# Altium PCB uTCA_MCH_PCB3.pcbdoc (part 8 of 8)
Units mm, origin at the board's own origin, x right, y up, seen from the top; angles counter-clockwise.
Board outline 182.75 x 75.8 mm, 10 copper layers (Top Layer, GND1, MidLayer1, PWR1, Mid-Layer 2, GND2, PWR2, Mid-Layer 3, GND3, Bottom Layer), stack 1.568 mm thick; 778 components, 977 nets, 4756 pads, 1214 vias.
Unrouted connection lines stored in the file: 1790.
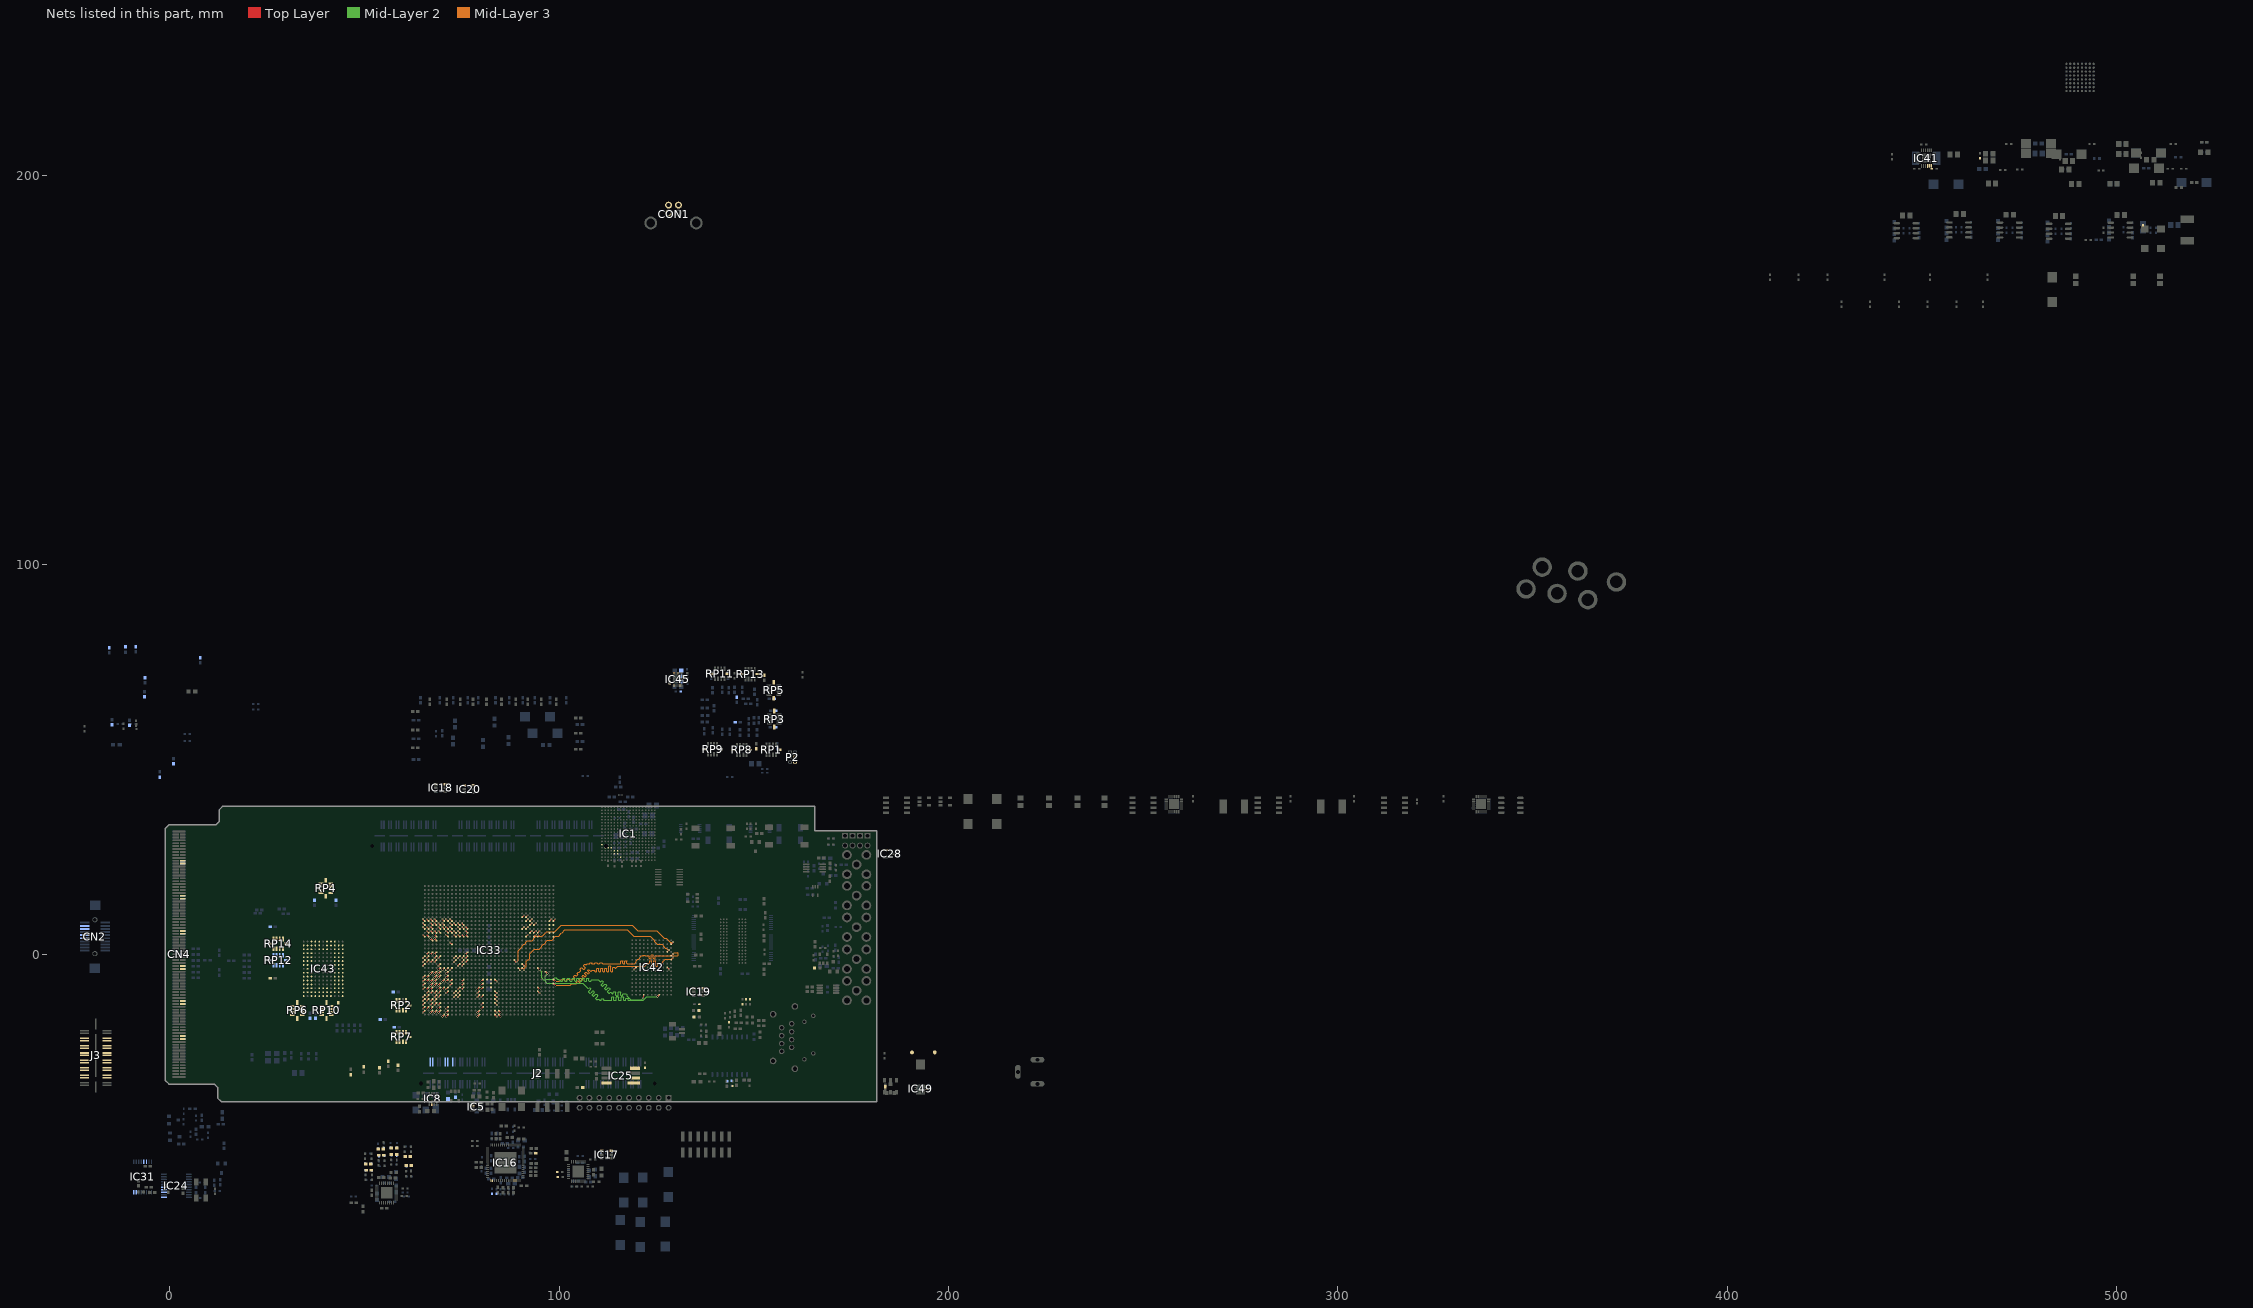
[diagram p16: the nets of this part, all layers, seen from the top]

## Via types
v1: diameter 0.5, hole 0.2, Top Layer to Bottom Layer, 1149 vias
v2: diameter 0.508, hole 0.254, Top Layer to Bottom Layer, 32 vias
v3: diameter 0.66, hole 0.33, Top Layer to Bottom Layer, tented top, 29 vias
v4: diameter 0.5, hole 0.2, Top Layer to Bottom Layer, tented top, 4 vias

## Nets (pads, with @x,y where several pads share a name; then routed paths per layer and width w, separated by ;. In a path a pad name is that pad's centre, name@x,y a point inside that pad or via, vN(x,y) a via of type N, cw(c..) or ccw(c..) an arc to the next point about the centre after c; other vN are vias at no path point) (continued)
Q1_Q32: IC33.A26 IC42.K1 | length 53.9
  Top Layer w0.175: IC33.A26@98.5,-7.5 v1(99,-8) ; IC42.K1@128.75,-1.4 v1(129.25,-0.9)
  Mid-Layer 3 w0.109: v1(99,-8) 102.8,-8 103.2,-7.6 104.4,-7.6 104.509,-7.491 104.509,-7.345 104.372,-7.208 104.372,-7.062 104.591,-6.843 104.737,-6.843 105.157,-7.263 105.302,-7.263 105.521,-7.045 105.521,-6.899 105.134,-6.512 105.134,-6.366 105.353,-6.147 105.498,-6.147 105.885,-6.534 106.031,-6.534 106.25,-6.316 106.25,-6.17 105.874,-5.794 105.874,-5.648 106.093,-5.43 106.238,-5.43 106.614,-5.806 106.76,-5.806 106.979,-5.587 106.979,-5.441 106.592,-5.054 106.592,-4.908 106.81,-4.69 106.956,-4.69 107.343,-5.077 107.489,-5.077 107.708,-4.858 107.708,-4.712 107.288,-4.292 107.288,-4.147 107.506,-3.928 107.652,-3.928 108.072,-4.348 108.218,-4.348 108.466,-4.1 109,-4.1 109.123,-4.223 109.123,-4.347 109.226,-4.45 109.535,-4.45 109.638,-4.347 109.638,-3.753 109.742,-3.65 110.051,-3.65 110.154,-3.753 110.154,-4.347 110.257,-4.45 110.566,-4.45 110.669,-4.347 110.669,-3.753 110.772,-3.65 111.082,-3.65 111.185,-3.753 111.185,-4.347 111.288,-4.45 111.597,-4.45 111.7,-4.347 111.7,-3.753 111.803,-3.65 112.112,-3.65 112.215,-3.753 112.215,-4.347 112.319,-4.45 112.628,-4.45 112.731,-4.347 112.731,-3.087 112.834,-2.984 113.143,-2.984 113.246,-3.087 113.246,-4.347 113.349,-4.45 113.659,-4.45 113.762,-4.347 113.762,-3.44 113.865,-3.337 114.174,-3.337 114.277,-3.44 114.277,-3.477 114.35,-3.55 114.6,-3.55 115.05,-3.1 122,-3.1 122.771,-2.329 123.155,-2.329 123.258,-2.226 123.258,-1.737 123.361,-1.634 123.67,-1.634 123.773,-1.737 123.773,-3.026 123.876,-3.129 124.185,-3.129 124.288,-3.026 124.288,-1.737 124.392,-1.634 124.701,-1.634 124.804,-1.737 124.804,-3.026 124.907,-3.129 125.216,-3.129 125.319,-3.026 125.319,-2.433 125.422,-2.329 126.378,-2.329 126.629,-2.078 126.629,-1.913 127.213,-1.329 128.821,-1.329 v1(129.25,-0.9)
Q1_Q33: IC33.A25 IC42.L1 | length 48
  Top Layer w0.175: IC33.A25@98.5,-6.5 v1(99,-7) ; IC42.L1@128.75,-0.4 v1(129.25,0.1)
  Mid-Layer 3 w0.109: v1(99,-7) 99.7,-7 100,-7 100.4,-6.6 100.631,-6.6 100.831,-6.4 101.2,-6.4 101.323,-6.523 101.323,-6.677 101.446,-6.8 101.815,-6.8 101.938,-6.677 101.938,-6.523 102.062,-6.4 102.431,-6.4 102.631,-6.6 103.15,-6.6 103.313,-6.437 103.596,-6.437 103.857,-6.176 103.857,-6.002 103.748,-5.893 103.748,-5.719 104.009,-5.458 104.183,-5.458 104.292,-5.567 104.466,-5.567 104.727,-5.305 104.727,-5.131 104.619,-5.023 104.619,-4.849 104.88,-4.587 105.163,-4.587 105.4,-4.35 105.531,-4.219 105.531,-4.045 105.422,-3.937 105.422,-3.763 105.683,-3.501 105.857,-3.501 106.249,-3.893 106.423,-3.893 106.684,-3.632 106.684,-3.458 106.292,-3.066 106.292,-2.892 106.553,-2.631 106.727,-2.631 106.836,-2.74 107.01,-2.74 107.25,-2.5 107.805,-2.5 107.908,-2.397 107.908,-2.303 108.011,-2.2 108.32,-2.2 108.423,-2.303 108.423,-2.397 108.526,-2.5 109.085,-2.5 109.208,-2.377 109.208,-2.307 109.331,-2.184 109.7,-2.184 109.823,-2.307 109.823,-2.377 109.946,-2.5 110.315,-2.5 110.438,-2.377 110.438,-2.307 110.562,-2.184 110.931,-2.184 111.054,-2.307 111.054,-2.377 111.177,-2.5 111.7,-2.5 111.8,-2.4 115.755,-2.4 115.858,-2.297 115.858,-1.803 115.961,-1.7 116.27,-1.7 116.373,-1.803 116.373,-2.297 116.476,-2.4 116.785,-2.4 116.888,-2.297 116.888,-1.803 116.992,-1.7 117.301,-1.7 117.404,-1.803 117.404,-2.297 117.507,-2.4 119.357,-2.4 119.8,-1.957 119.8,-1.7 120.171,-1.329 120.428,-1.329 120.679,-1.078 120.679,-0.863 121.093,-0.45 121.455,-0.45 121.558,-0.347 121.558,-0.329 121.661,-0.226 121.97,-0.226 122.073,-0.329 122.073,-0.347 122.176,-0.45 123.001,-0.45 123.104,-0.553 123.104,-1.047 123.207,-1.15 123.516,-1.15 123.619,-1.047 123.619,-0.237 123.722,-0.134 124.032,-0.134 124.135,-0.237 124.135,-1.047 124.238,-1.15 124.547,-1.15 124.65,-1.047 124.65,-0.553 124.753,-0.45 130.4,-0.45 130.55,-0.3 130.55,0.25 130.4,0.4 129.55,0.4 v1(129.25,0.1)
Q1_Q34: IC33.K22 IC42.M2 | length 48.3
  Top Layer w0.175: IC33.K22@89.5,-3.5 v1(90,-4) ; IC42.M2@127.75,0.6 v1(128.25,1.1)
  Mid-Layer 3 w0.109: v1(90,-4) 90.43,-3.571 91.037,-3.571 91.546,-3.062 91.546,-1.821 91.912,-1.454 92.188,-1.454 92.455,-1.188 92.455,0.105 93.666,1.316 94.923,1.316 95.571,1.963 95.571,2.178 95.963,2.571 96.178,2.571 96.571,2.963 96.571,3.178 96.963,3.571 98.178,3.571 98.571,3.963 98.571,4.178 99.043,4.65 99.9,4.65 100.457,5.207 100.457,5.349 100.68,5.572 100.822,5.572 101.5,6.25 117.5,6.25 119.15,4.6 123.4,4.6 124.5,3.5 124.5,3.243 125.213,2.53 126.428,2.53 126.87,2.087 126.87,1.872 127.192,1.55 127.5,1.55 127.95,1.1 v1(128.25,1.1)
Q1_Q35: IC33.L20 IC42.P1 | length 49.1
  Top Layer w0.175: IC33.L20@88.5,-1.5 v1(89,-2) ; IC42.P1@128.75,2.6 v1(129.25,3.1)
  Mid-Layer 3 w0.109: v1(89,-2) 89.5,-1.5 89.5,0.9 90.171,1.571 90.178,1.571 90.571,1.963 90.571,2.178 90.963,2.571 91.178,2.571 91.43,2.822 91.43,3.037 91.843,3.45 93.057,3.45 93.43,3.822 93.43,4.037 93.963,4.571 95.632,4.571 96.862,5.8 98.9,5.8 100.5,7.4 118.75,7.4 120.15,6 125.1,6 127.028,4.072 127.528,4.072 128.5,3.1 v1(129.25,3.1)
Q1_RPS: IC33.C23 IC42.A8 | length 47.8
  Top Layer w0.175: IC33.C23@96.5,-4.5 v1(97,-5) ; v1(121.6,-11.2) 121.75,-11.05 IC42.A8@121.75,-10.4
  Mid-Layer 2 w0.109: v1@97,-5.15 96.45,-5.7 96.45,-6.25 96.65,-6.45 98.635,-6.45 98.758,-6.327 98.758,-6.173 98.881,-6.05 99.25,-6.05 99.373,-6.173 99.373,-6.327 99.496,-6.45 99.8,-6.45 99.95,-6.6 100.135,-6.6 100.258,-6.723 100.258,-6.877 100.381,-7 100.75,-7 100.873,-6.877 100.873,-6.323 100.996,-6.2 101.365,-6.2 101.488,-6.323 101.488,-6.877 101.612,-7 101.981,-7 102.104,-6.877 102.104,-6.323 102.227,-6.2 102.596,-6.2 102.719,-6.323 102.719,-6.877 102.842,-7 103.212,-7 103.335,-6.877 103.335,-6.323 103.458,-6.2 103.827,-6.2 103.95,-6.323 103.95,-6.877 104.073,-7 104.442,-7 104.565,-6.877 104.565,-6.323 104.689,-6.2 105.058,-6.2 105.181,-6.323 105.181,-6.877 105.304,-7 105.673,-7 105.796,-6.877 105.796,-6.323 105.919,-6.2 106.289,-6.2 106.412,-6.323 106.412,-6.877 106.535,-7 106.904,-7 107.027,-6.877 107.027,-6.323 107.15,-6.2 107.519,-6.2 107.642,-6.323 107.642,-6.877 107.766,-7 108.135,-7 108.258,-6.877 108.258,-6.723 108.381,-6.6 110.1,-6.6 110.531,-7.031 110.705,-7.031 110.884,-6.851 111.058,-6.851 111.319,-7.112 111.319,-7.286 111.053,-7.553 110.786,-7.819 110.786,-7.993 111.047,-8.254 111.221,-8.254 111.488,-7.988 111.754,-7.721 111.928,-7.721 112.19,-7.982 112.19,-8.157 111.923,-8.423 111.657,-8.69 111.657,-8.864 111.918,-9.125 112.092,-9.125 112.358,-8.858 112.625,-8.592 112.799,-8.592 113.06,-8.853 113.06,-9.027 112.793,-9.293 112.527,-9.56 112.527,-9.734 112.788,-9.995 112.962,-9.995 113.141,-9.816 113.316,-9.816 113.62,-10.12 113.805,-10.12 113.928,-9.997 113.928,-9.744 114.051,-9.62 114.421,-9.62 114.544,-9.744 114.544,-10.497 114.667,-10.62 115.036,-10.62 115.159,-10.497 115.159,-9.744 115.282,-9.62 115.651,-9.62 115.774,-9.744 115.774,-10.497 115.897,-10.62 116.267,-10.62 116.39,-10.497 116.39,-10.244 116.513,-10.12 117.128,-10.12 117.45,-10.443 117.45,-10.743 118.357,-11.65 121.15,-11.65 v1(121.6,-11.2)
Q1_WPS: IC33.E22 IC42.A4 | length 48.2
  Top Layer w0.175: IC33.E22@94.5,-3.5 v1(95,-4) ; v1(125.25,-10.9) IC42.A4@125.75,-10.4
  Mid-Layer 2 w0.109: v1(95,-4) 95.5,-4.5 95.5,-6.107 95.963,-6.571 96.178,-6.571 96.571,-6.963 96.571,-7.178 96.843,-7.45 106.05,-7.45 107.356,-8.756 107.53,-8.756 107.709,-8.576 107.883,-8.576 108.144,-8.837 108.144,-9.011 107.878,-9.278 107.611,-9.544 107.611,-9.718 107.872,-9.979 108.046,-9.979 108.313,-9.713 108.579,-9.446 108.753,-9.446 109.015,-9.707 109.015,-9.882 108.748,-10.148 108.482,-10.415 108.482,-10.589 108.743,-10.85 108.917,-10.85 109.183,-10.583 109.45,-10.317 109.624,-10.317 109.885,-10.578 109.885,-10.752 109.618,-11.018 109.352,-11.285 109.352,-11.459 109.613,-11.72 109.787,-11.72 109.966,-11.541 110.141,-11.541 110.484,-11.884 110.669,-11.884 110.792,-11.761 110.792,-11.507 110.915,-11.384 111.284,-11.384 111.407,-11.507 111.407,-11.761 111.53,-11.884 113.335,-11.884 113.458,-11.761 113.458,-11.007 113.581,-10.884 113.95,-10.884 114.073,-11.007 114.073,-11.761 114.196,-11.884 114.565,-11.884 114.688,-11.761 114.688,-11.007 114.812,-10.884 115.181,-10.884 115.304,-11.007 115.304,-11.761 115.427,-11.884 115.796,-11.884 115.919,-11.761 115.919,-11.007 116.042,-10.884 116.412,-10.884 116.535,-11.007 116.535,-11.761 116.658,-11.884 117.027,-11.884 117.15,-11.761 117.15,-11.389 117.273,-11.266 117.642,-11.266 117.765,-11.389 117.765,-11.761 117.889,-11.884 121.566,-11.884 122.55,-10.9 v1(125.25,-10.9)
Q2_A0: IC33.AJ27 IC43.B4 RP6.5 | length 0.7
  Top Layer w0.175: v1(70,-9) IC33.AJ27@70.5,-8.5
Q2_A1: IC33.AM27 IC43.B8 RP6.10 | length 0.7
  Top Layer w0.175: v1(67,-9) IC33.AM27@67.5,-8.5
Q2_A2: IC33.AJ25 IC43.C5 RP6.7 | length 0.7
  Top Layer w0.175: v1(70,-7) IC33.AJ25@70.5,-6.5
Q2_A3: IC33.AH25 IC43.C6 RP6.8 | length 0.7
  Top Layer w0.175: v1(71,-7) IC33.AH25@71.5,-6.5
Q2_A4: IC33.AM28 IC43.C7 RP6.9 | length 0.7
  Top Layer w0.175: v1(67,-10) IC33.AM28@67.5,-9.5
Q2_A5: IC33.AN28 IC43.N5 RP2.9 | length 0.7
  Top Layer w0.175: v1(66,-10) IC33.AN28@66.5,-9.5
Q2_A6: IC33.AK28 IC43.N6 RP6.3 | length 0.7
  Top Layer w0.175: v1(69,-10) IC33.AK28@69.5,-9.5
Q2_A7: IC33.AL28 IC43.N7 RP6.4 | length 0.7
  Top Layer w0.175: v1(68,-10) IC33.AL28@68.5,-9.5
Q2_A8: IC33.AP29 IC43.P4 RP4.10 | length 0.7
  Top Layer w0.175: v1(65,-11) IC33.AP29@65.5,-10.5
Q2_A9: IC33.AN29 IC43.P5 RP4.9 | length 0.7
  Top Layer w0.175: v1(66,-11) IC33.AN29@66.5,-10.5
Q2_A10: IC33.AL29 IC43.P7 RP4.5 | length 0.7
  Top Layer w0.175: v1(68,-11) IC33.AL29@68.5,-10.5
Q2_A11: IC33.AP31 IC43.P8 RP4.3 | length 0.7
  Top Layer w0.175: v1(65,-13) IC33.AP31@65.5,-12.5
Q2_A12: IC33.AP30 IC43.R3 RP2.10 | length 0.7
  Top Layer w0.175: v1(65,-12) IC33.AP30@65.5,-11.5
Q2_A13: IC33.AG26 IC43.R4 RP2.7 | length 0.7
  Top Layer w0.175: v1(72,-8) IC33.AG26@72.5,-7.5
Q2_A14: IC33.AG25 IC43.R5 RP4.8 | length 0.7
  Top Layer w0.175: v1(72,-7) IC33.AG25@72.5,-6.5
Q2_A15: IC33.AM30 IC43.R7 RP4.7 | length 0.7
  Top Layer w0.175: v1(67,-12) IC33.AM30@67.5,-11.5
Q2_A16: IC33.AN30 IC43.R8 RP4.4 | length 0.7
  Top Layer w0.175: v1(66,-12) IC33.AN30@66.5,-11.5
Q2_A17: IC33.AH28 IC43.R9 RP4.2 | length 0.7
  Top Layer w0.175: v1(71,-10) IC33.AH28@71.5,-9.5
Q2_A18: IC33.AH27 IC43.A9 RP10.5 | length 0.7
  Top Layer w0.175: v1(71,-9) IC33.AH27@71.5,-8.5
Q2_BWS0: IC33.AC14 IC43.B7 | length 0.7
  Top Layer w0.175: v1(76,5) IC33.AC14@76.5,4.5
Q2_BWS1: IC33.AM11 IC43.A7 | length 0.7
  Top Layer w0.175: v1(67,8) IC33.AM11@67.5,7.5
Q2_BWS2: IC33.AG13 IC43.A5 | length 0.7
  Top Layer w0.175: v1(72,6) IC33.AG13@72.5,5.5
Q2_BWS3: IC33.AL13 IC43.B5 | length 0.7
  Top Layer w0.175: v1(68,6) IC33.AL13@68.5,5.5
Q2_CQ_N: IC33.AK27 IC43.A1 | length 0.7
  Top Layer w0.125: v1(69,-9) IC33.AK27@69.5,-8.5
Q2_CQ_P: IC33.AN27 IC43.A11 | length 0.7
  Top Layer w0.125: v1(66,-9) IC33.AN27@66.5,-8.5
Q2_D0: IC33.AE13 IC43.P10 RP14.10 | length 0.7
  Top Layer w0.175: v1(74,6) IC33.AE13@74.5,5.5
Q2_D1: IC33.AE12 IC43.N11 RP14.9 | length 0.7
  Top Layer w0.175: v1(74,7) IC33.AE12@74.5,6.5
Q2_D2: IC33.AJ11 IC43.M11 RP14.8 | length 0.7
  Top Layer w0.175: v1(70,8) IC33.AJ11@70.5,7.5
Q2_D3: IC33.AK11 IC43.K10 RP14.7 | length 0.7
  Top Layer w0.175: v1(69,8) IC33.AK11@69.5,7.5
Q2_D4: IC33.AD14 IC43.J11 RP14.5 | length 0.7
  Top Layer w0.175: v1(75,5) IC33.AD14@75.5,4.5
Q2_D5: IC33.AK12 IC43.G11 RP14.4 | length 0.7
  Top Layer w0.175: v1(69,7) IC33.AK12@69.5,6.5
Q2_D6: IC33.AJ12 IC43.E10 RP14.3 | length 0.7
  Top Layer w0.175: v1(70,7) IC33.AJ12@70.5,6.5
Q2_D7: IC33.AF11 IC43.D11 RP14.2 | length 0.7
  Top Layer w0.175: v1(73,8) IC33.AF11@73.5,7.5
Q2_D8: IC33.AE11 IC43.C11 RP12.10 | length 0.7
  Top Layer w0.175: v1(74,8) IC33.AE11@74.5,7.5
Q2_D9: IC33.AM10 IC43.N10 RP12.9 | length 0.7
  Top Layer w0.175: v1(67,9) IC33.AM10@67.5,8.5
Q2_D10: IC33.AL10 IC43.M9 RP12.8 | length 0.7
  Top Layer w0.175: v1(68,9) IC33.AL10@68.5,8.5
Q2_D11: IC33.AG11 IC43.L9 RP12.7 | length 0.7
  Top Layer w0.175: v1(72,8) IC33.AG11@72.5,7.5
Q2_D12: IC33.AG10 IC43.J9 RP12.5 | length 0.7
  Top Layer w0.175: v1(72,9) IC33.AG10@72.5,8.5
Q2_D13: IC33.AL11 IC43.G10 RP12.4 | length 0.7
  Top Layer w0.175: v1(68,8) IC33.AL11@68.5,7.5
Q2_D14: IC33.AJ10 IC43.F9 RP12.3 | length 0.7
  Top Layer w0.175: v1(70,9) IC33.AJ10@70.5,8.5
Q2_D15: IC33.AH10 IC43.D10 RP12.2 | length 0.7
  Top Layer w0.175: v1(71,9) IC33.AH10@71.5,8.5
Q2_D16: IC33.AC13 IC43.C9 RP6.2 | length 0.7
  Top Layer w0.175: v1(76,6) IC33.AC13@76.5,5.5
Q2_D17: IC33.AC12 IC43.B9 RP10.4 | length 0.7
  Top Layer w0.175: v1(76,7) IC33.AC12@76.5,6.5
Q2_D18: IC33.AD12 IC43.B3 RP10.10 | length 0.7
  Top Layer w0.175: v1(75,7) IC33.AD12@75.5,6.5
Q2_D19: IC33.AD11 IC43.C3 RP10.9 | length 0.7
  Top Layer w0.175: v1(75,8) IC33.AD11@75.5,7.5
Q2_D20: IC33.AP11 IC43.D2 RP10.8 | length 0.7
  Top Layer w0.175: v1(65,8) IC33.AP11@65.5,7.5
Q2_D21: IC33.AP12 IC43.F3 RP10.2 | length 0.7
  Top Layer w0.175: v1(65,7) IC33.AP12@65.5,6.5
Q2_D22: IC33.AF13 IC43.G2 RP10.7 | length 0.7
  Top Layer w0.175: v1(73,6) IC33.AF13@73.5,5.5
Q2_D23: IC33.AM12 IC43.J3 RP10.3 | length 0.7
  Top Layer w0.175: v1(67,7) IC33.AM12@67.5,6.5
Q2_D24: IC33.AN12 IC43.L3 RP7.4 | length 0.7
  Top Layer w0.175: v1(66,7) IC33.AN12@66.5,6.5
Q2_D25: IC33.AE14 IC43.M3 RP7.3 | length 0.7
  Top Layer w0.175: v1(74,5) IC33.AE14@74.5,4.5
Q2_D26: IC33.AF14 IC43.N2 RP7.2 | length 0.7
  Top Layer w0.175: v1(73,5) IC33.AF14@73.5,4.5
Q2_D27: IC33.AN13 IC43.C1 RP7.10 | length 0.7
  Top Layer w0.175: v1(66,6) IC33.AN13@66.5,5.5
Q2_D28: IC33.AM13 IC43.D1 RP7.9 | length 0.7
  Top Layer w0.175: v1(67,6) IC33.AM13@67.5,5.5
Q2_D29: IC33.AG12 IC43.E2 RP7.8 | length 0.7
  Top Layer w0.175: v1(72,7) IC33.AG12@72.5,6.5
Q2_D30: IC33.AH12 IC43.G1 RP7.7 | length 0.7
  Top Layer w0.175: v1(71,7) IC33.AH12@71.5,6.5
Q2_D31: IC33.AK13 IC43.J1 RP7.5 | length 0.7
  Top Layer w0.175: v1(69,6) IC33.AK13@69.5,5.5
Q2_D32: IC33.AH13 IC43.K2 RP2.5 | length 0.7
  Top Layer w0.175: v1(71,6) IC33.AH13@71.5,5.5
Q2_D33: IC33.AH14 IC43.M1 RP2.4 | length 0.7
  Top Layer w0.175: v1(71,5) IC33.AH14@71.5,4.5
Q2_D34: IC33.AP14 IC43.N1 RP2.3 | length 0.7
  Top Layer w0.175: v1(65,5) IC33.AP14@65.5,4.5
Q2_D35: IC33.AN14 IC43.P2 RP2.2 | length 0.7
  Top Layer w0.175: v1(66,5) IC33.AN14@66.5,4.5
Q2_DOFF: IC33.AK26 IC43.H1 | length 0.7
  Top Layer w0.175: v1(69,-8) IC33.AK26@69.5,-7.5
Q2_K_N: IC33.AH24 IC43.A6 | length 0.7
  Top Layer w0.125: v1(71,-6) IC33.AH24@71.5,-5.5
Q2_K_P: IC33.AH23 IC43.B6 | length 0.7
  Top Layer w0.125: v1(71,-5) IC33.AH23@71.5,-4.5
Q2_Q0: IC33.AP24 IC43.P11 | length 0.7
  Top Layer w0.175: v1(65,-6) IC33.AP24@65.5,-5.5
Q2_Q1: IC33.AP25 IC43.M10 | length 0.7
  Top Layer w0.175: v1(65,-7) IC33.AP25@65.5,-6.5
Q2_Q2: IC33.AL24 IC43.L11 | length 0.7
  Top Layer w0.175: v1(68,-6) IC33.AL24@68.5,-5.5
Q2_Q3: IC33.AK23 IC43.K11 | length 0.7
  Top Layer w0.175: v1(69,-5) IC33.AK23@69.5,-4.5
Q2_Q4: IC33.AN24 IC43.J10 | length 0.7
  Top Layer w0.175: v1(66,-6) IC33.AN24@66.5,-5.5
Q2_Q5: IC33.AN25 IC43.F11 | length 0.7
  Top Layer w0.175: v1(66,-7) IC33.AN25@66.5,-6.5
Q2_Q6: IC33.AL25 IC43.E11 | length 0.7
  Top Layer w0.175: v1(68,-7) IC33.AL25@68.5,-6.5
Q2_Q7: IC33.AM25 IC43.C10 | length 0.7
  Top Layer w0.175: v1(67,-7) IC33.AM25@67.5,-6.5
Q2_Q8: IC33.AP26 IC43.B11 | length 0.7
  Top Layer w0.175: v1(65,-8) IC33.AP26@65.5,-7.5
Q2_Q9: IC33.AP27 IC43.P9 | length 0.7
  Top Layer w0.175: v1(65,-9) IC33.AP27@65.5,-8.5
Q2_Q10: IC33.AE21 IC43.N9 | length 0.7
  Top Layer w0.175: v1(74,-3) IC33.AE21@74.5,-2.5
Q2_Q11: IC33.AD21 IC43.L10 | length 0.7
  Top Layer w0.175: v1(75,-3) IC33.AD21@75.5,-2.5
Q2_Q12: IC33.AM18 IC43.K9 | length 0.7
  Top Layer w0.175: v1(67,0) IC33.AM18@67.5,0.5
Q2_Q13: IC33.AL18 IC43.G9 | length 0.7
  Top Layer w0.175: v1(68,0) IC33.AL18@68.5,0.5
Q2_Q14: IC33.AG22 IC43.F10 | length 0.7
  Top Layer w0.175: v1(72,-4) IC33.AG22@72.5,-3.5
Q2_Q15: IC33.AH22 IC43.E9 | length 0.7
  Top Layer w0.175: v1(71,-4) IC33.AH22@71.5,-3.5
Q2_Q16: IC33.AP19 IC43.D9 | length 0.7
  Top Layer w0.175: v1(65,-1) IC33.AP19@65.5,-0.5
Q2_Q17: IC33.AN18 IC43.B10 | length 0.7
  Top Layer w0.175: v1(66,0) IC33.AN18@66.5,0.5
Q2_Q18: IC33.AK22 IC43.B2 | length 0.7
  Top Layer w0.175: v1(69,-4) IC33.AK22@69.5,-3.5
Q2_Q19: IC33.AN19 IC43.D3 | length 0.7
  Top Layer w0.175: v1(66,-1) IC33.AN19@66.5,-0.5
Q2_Q20: IC33.AN20 IC43.E3 | length 0.7
  Top Layer w0.175: v1(66,-2) IC33.AN20@66.5,-1.5
Q2_Q21: IC33.AC20 IC43.F2 | length 0.7
  Top Layer w0.175: v1(76,-2) IC33.AC20@76.5,-1.5
Q2_Q22: IC33.AD20 IC43.G3 | length 0.7
  Top Layer w0.175: v1(75,-2) IC33.AD20@75.5,-1.5
Q2_Q23: IC33.AM20 IC43.K3 | length 0.7
  Top Layer w0.175: v1(67,-2) IC33.AM20@67.5,-1.5
Q2_Q24: IC33.AL20 IC43.L2 | length 0.7
  Top Layer w0.175: v1(68,-2) IC33.AL20@68.5,-1.5
Q2_Q25: IC33.AF19 IC43.N3 | length 0.7
  Top Layer w0.175: v1(73,-1) IC33.AF19@73.5,-0.5
Q2_Q26: IC33.AE19 IC43.P3 | length 0.7
  Top Layer w0.175: v1(74,-1) IC33.AE19@74.5,-0.5
Q2_Q27: IC33.AP20 IC43.B1 | length 0.7
  Top Layer w0.175: v1(65,-2) IC33.AP20@65.5,-1.5
Q2_Q28: IC33.AP21 IC43.C2 | length 0.7
  Top Layer w0.175: v1(65,-3) IC33.AP21@65.5,-2.5
Q2_Q29: IC33.AK19 IC43.E1 | length 0.7
  Top Layer w0.175: v1(69,-1) IC33.AK19@69.5,-0.5
Q2_Q30: IC33.AL19 IC43.F1 | length 0.7
  Top Layer w0.175: v1(68,-1) IC33.AL19@68.5,-0.5
Q2_Q31: IC33.AF20 IC43.J2 | length 0.7
  Top Layer w0.175: v1(73,-2) IC33.AF20@73.5,-1.5
Q2_Q32: IC33.AC19 IC43.K1 | length 0.7
  Top Layer w0.175: v1(76,-1) IC33.AC19@76.5,-0.5
Q2_Q33: IC33.AM23 IC43.L1 | length 0.7
  Top Layer w0.175: v1(67,-5) IC33.AM23@67.5,-4.5
Q2_Q34: IC33.AL23 IC43.M2 | length 0.7
  Top Layer w0.175: v1(68,-5) IC33.AL23@68.5,-4.5
Q2_Q35: IC33.AK21 IC43.P1 | length 0.7
  Top Layer w0.175: v1(69,-3) IC33.AK21@69.5,-2.5
Q2_RPS: IC33.AM26 IC43.A8 | length 0.7
  Top Layer w0.175: v1(67,-8) IC33.AM26@67.5,-7.5
Q2_WPS: IC33.AL26 IC43.A4 | length 0.7
  Top Layer w0.175: v1(68,-8) IC33.AL26@68.5,-7.5
QDR2_VTT_GOOD: IC33.AM15 IC45.9 R214.1 | length 0.7
  Top Layer w0.175: v1(67,4) IC33.AM15@67.5,3.5
QDRII1_CAL_DONE: IC33.AP10 TP1.1 | length 0.7
  Top Layer w0.175: v1(65,9) IC33.AP10@65.5,8.5
QDRII2_CAL_DONE: IC33.AN10 TP2.1 | length 0.7
  Top Layer w0.175: v1(66,9) IC33.AN10@66.5,8.5
QDRII_200CLK_N: IC33.B10 R70.1 R74.2 | length 0.7
  Top Layer w0.125: IC33.B10@97.5,8.5 v1(98,9)
QDRII_200CLK_P: IC33.A10 R73.1 R75.2 | length 0.7
  Top Layer w0.125: IC33.A10@98.5,8.5 v1(99,9)
QDRII_CLK_N: IC16.45 IC33.H9 | length 0.7
  Top Layer w0.125: IC33.H9@91.5,9.5 v1(92,10)
QDRII_CLK_P: IC16.46 IC33.J9 | length 0.7
  Top Layer w0.125: IC33.J9@90.5,9.5 v1(91,10)
QDRII_VTT: C377.1 C378.1 C379.1 C380.1 C381.1 C382.1 C383.1 C384.1 C385.1 C386.1 C387.1 C388.1 C389.1 C390.1 C391.1 C392.1 C398.2 C399.2 C400.2 C401.2 C402.2 C403.2 C404.2 C405.2 C406.1 C407.1 C408.1 C409.1 C410.1 C411.1 C412.1 C413.1 C414.2 C415.2 C416.2 IC45.3 IC45.5 RP1.1 RP1.6 RP2.1 RP2.6 RP3.1 RP3.6 RP4.1 RP4.6 RP5.1 RP5.6 RP6.1 RP6.6 RP7.1 RP7.6 RP8.1 RP8.6 RP9.1 RP9.6 RP10.1 RP10.6 RP11.1 RP11.6 RP12.1 RP12.6 RP13.1 RP13.6 RP14.1 RP14.6
REF_10M: C67.2 C188.1 R34.2
RS232_FPGA_RXD: IC31.8 P2.6
RS232_FPGA_TXD: IC31.7 P2.4
RS232_MNG.RS232_MNG_RXD: IC31.13 J2.3
RS232_MNG.RS232_MNG_TXD: IC31.14 J2.1
RX_ER: IC1.U14 R146.1 R200.1
RXD0: IC1.T14 R151.1 R208.1
RXD1: IC1.R14 R147.1 R203.1
RXFD1_N: CN4.156 IC33.W26 | length 0.7
  Top Layer w0.125: v1(80,-8) IC33.W26@80.5,-7.5
RXFD1_P: CN4.157 IC33.W27 | length 0.7
  Top Layer w0.125: v1(80,-9) IC33.W27@80.5,-8.5
RXFD2_N: CN4.144 IC33.V25
RXFD2_P: CN4.145 IC33.W25 | length 0.7
  Top Layer w0.125: v1(80,-7) IC33.W25@80.5,-6.5
RXFD3_N: CN4.132 IC33.Y27 | length 0.7
  Top Layer w0.125: v1(79,-9) IC33.Y27@79.5,-8.5
RXFD3_P: CN4.133 IC33.Y28 | length 0.7
  Top Layer w0.125: v1(79,-10) IC33.Y28@79.5,-9.5
RXFD4_N: CN4.120 IC33.W32 | length 0.7
  Top Layer w0.125: v1(80,-14) IC33.W32@80.5,-13.5
RXFD4_P: CN4.121 IC33.W31 | length 0.7
  Top Layer w0.125: v1(80,-13) IC33.W31@80.5,-12.5
RXFD5_N: CN4.108 IC33.Y29 | length 0.7
  Top Layer w0.125: v1(79,-11) IC33.Y29@79.5,-10.5
RXFD5_P: CN4.109 IC33.W29 | length 0.7
  Top Layer w0.125: v1(80,-11) IC33.W29@80.5,-10.5
RXFD6_N: CN4.96 IC33.Y34 | length 0.7
  Top Layer w0.125: v1(79,-16) IC33.Y34@79.5,-15.5
RXFD6_P: CN4.97 IC33.Y33 | length 0.7
  Top Layer w0.125: v1(79,-15) IC33.Y33@79.5,-14.5
RXFD7_N: IC33.AM31 J3.27 | length 0.7
  Top Layer w0.125: v1(67,-13) IC33.AM31@67.5,-12.5
RXFD7_P: IC33.AL30 J3.25 | length 0.7
  Top Layer w0.125: v1(68,-12) IC33.AL30@68.5,-11.5
RXFD8_N: IC33.AP33 J3.23 | length 0.7
  Top Layer w0.125: v1(65,-15) IC33.AP33@65.5,-14.5
RXFD8_P: IC33.AP32 J3.21 | length 0.7
  Top Layer w0.125: v1(65,-14) IC33.AP32@65.5,-13.5
RXFD9_N: IC33.AM32 J3.19 | length 0.7
  Top Layer w0.125: v1(67,-14) IC33.AM32@67.5,-13.5
RXFD9_P: IC33.AN32 J3.17 | length 0.7
  Top Layer w0.125: v1(66,-14) IC33.AN32@66.5,-13.5
RXFD10_N: IC33.AL33 J3.15 | length 0.7
  Top Layer w0.125: v1(68,-15) IC33.AL33@68.5,-14.5
RXFD10_P: IC33.AM33 J3.13 | length 0.7
  Top Layer w0.125: v1(67,-15) IC33.AM33@67.5,-14.5
RXFD11_N: IC33.AK31 J3.11 | length 0.7
  Top Layer w0.125: v1(69,-13) IC33.AK31@69.5,-12.5
RXFD11_P: IC33.AL31 J3.9 | length 0.7
  Top Layer w0.125: v1(68,-13) IC33.AL31@68.5,-12.5
RXFD12_N: IC33.AK32 J3.7 | length 0.7
  Top Layer w0.125: v1(69,-14) IC33.AK32@69.5,-13.5
RXFD12_P: IC33.AK33 J3.5 | length 0.7
  Top Layer w0.125: v1(69,-15) IC33.AK33@69.5,-14.5
SCL_TMP: IC17.1 IC18.1 IC19.1 IC20.1 IC33.G13 R129.1 | length 0.7
  Top Layer w0.175: IC33.G13@92.5,5.5 v1(93,6)
SDA_TMP: IC17.6 IC18.6 IC19.6 IC20.6 IC33.H14 R128.1 | length 0.7
  Top Layer w0.175: IC33.H14@91.5,4.5 v1(92,5)
SPI0.SPI0_MISO: IC1.N16 IC25.8
SPI0.SPI0_MOSI: IC1.N15 IC25.1
SPI0.SPI0_NPCS0: IC1.M17 IC25.4 R166.1
SPI0.SPI0_SPCK: IC1.P15 IC25.2
SPI1.SPI1_MISO: IC24.1 IC33.AL14 | length 0.7
  Top Layer w0.175: v1(68,5) IC33.AL14@68.5,4.5
SPI1.SPI1_MOSI: IC24.3 IC33.AL15 | length 0.7
  Top Layer w0.175: v1(68,4) IC33.AL15@68.5,3.5
SPI1.SPI1_NPCS0: IC24.5 IC33.AG16 | length 0.7
  Top Layer w0.175: v1(72,3) IC33.AG16@72.5,2.5
SPI1.SPI1_SPCK: IC24.4 IC33.AC18 | length 0.7
  Top Layer w0.175: v1(76,0) IC33.AC18@76.5,0.5
SYST_MON_N0: C200.1 IC33.F11 R135.1 | length 0.7
  Top Layer w0.175: IC33.F11@93.5,7.5 v1(94,8)
SYST_MON_N1: C198.1 IC33.A14 R123.1
SYST_MON_N2: C195.1 IC33.E14 R112.1 | length 0.7
  Top Layer w0.175: IC33.E14@94.5,4.5 v1(95,5)
SYST_MON_N3: C189.1 IC33.G10 R101.1 | length 0.7
  Top Layer w0.175: IC33.G10@92.5,8.5 v1(93,9)
SYST_MON_N4: C199.1 IC33.B13 R133.1
SYST_MON_N5: C197.1 IC33.J12 R121.1 | length 0.7
  Top Layer w0.175: IC33.J12@90.5,6.5 v1(91,7)
SYST_MON_N6: C196.1 IC33.B11 R113.1
SYST_MON_N7: C190.1 IC33.F13 R103.1 | length 0.7
  Top Layer w0.175: IC33.F13@93.5,5.5 v1(94,6)
SYST_MON_P0: C200.2 IC33.G11 R137.1 | length 0.7
  Top Layer w0.175: IC33.G11@92.5,7.5 v1(93,8)
SYST_MON_P1: C198.2 IC33.A13 R125.1
SYST_MON_P2: C195.2 IC33.F14 R114.1 | length 0.7
  Top Layer w0.175: IC33.F14@93.5,4.5 v1(94,5)
SYST_MON_P3: C189.2 IC33.H10 R104.1 | length 0.7
  Top Layer w0.175: IC33.H10@91.5,8.5 v1(92,9)
SYST_MON_P4: C199.2 IC33.B12 R136.1
SYST_MON_P5: C197.2 IC33.H12 R124.1 | length 0.7
  Top Layer w0.175: IC33.H12@91.5,6.5 v1(92,7)
SYST_MON_P6: C196.2 IC33.A11 R115.1
SYST_MON_P7: C190.2 IC33.E13 R105.1 | length 0.7
  Top Layer w0.175: IC33.E13@94.5,5.5 v1(95,6)
TX_CLK: IC1.V13 R144.1
TX_EN: IC1.P16 IC41.16
TXD0: IC41.17 R142.2
TXD1: IC41.18 R143.2
TXFD1_N: CN4.15 IC33.U27
TXFD1_P: CN4.14 IC33.U26
TXFD2_N: CN4.27 IC33.T34 | length 0.7
  Top Layer w0.125: IC33.T34@83.5,-15.5 v1(84,-16)
TXFD2_P: CN4.26 IC33.T33 | length 0.7
  Top Layer w0.125: IC33.T33@83.5,-14.5 v1(84,-15)
TXFD3_N: CN4.39 IC33.T31 | length 0.7
  Top Layer w0.125: IC33.T31@83.5,-12.5 v1(84,-13)
TXFD3_P: CN4.38 IC33.T30 | length 0.7
  Top Layer w0.125: IC33.T30@83.5,-11.5 v1(84,-12)
TXFD4_N: CN4.51 IC33.R34 | length 0.7
  Top Layer w0.125: IC33.R34@84.5,-15.5 v1(85,-16)
TXFD4_P: CN4.50 IC33.R33 | length 0.7
  Top Layer w0.125: IC33.R33@84.5,-14.5 v1(85,-15)
TXFD5_N: CN4.63 IC33.T29 | length 0.7
  Top Layer w0.125: IC33.T29@83.5,-10.5 v1(84,-11)
TXFD5_P: CN4.62 IC33.T28 | length 0.7
  Top Layer w0.125: IC33.T28@83.5,-9.5 v1(84,-10)
TXFD6_N: CN4.75 IC33.T25 | length 0.7
  Top Layer w0.125: IC33.T25@83.5,-6.5 v1(84,-7)
TXFD6_P: CN4.74 IC33.U25
TXFD7_N: IC33.AF29 J3.6 | length 0.7
  Top Layer w0.125: v1(73,-11) IC33.AF29@73.5,-10.5
TXFD7_P: IC33.AF28 J3.8 | length 0.7
  Top Layer w0.125: v1(73,-10) IC33.AF28@73.5,-9.5
TXFD8_N: IC33.AH34 J3.10 | length 0.7
  Top Layer w0.125: v1(71,-16) IC33.AH34@71.5,-15.5
TXFD8_P: IC33.AJ34 J3.12 | length 0.7
  Top Layer w0.125: v1(70,-16) IC33.AJ34@70.5,-15.5
TXFD9_N: IC33.AE29 J3.14 | length 0.7
  Top Layer w0.125: v1(74,-11) IC33.AE29@74.5,-10.5
TXFD9_P: IC33.AE28 J3.16 | length 0.7
  Top Layer w0.125: v1(74,-10) IC33.AE28@74.5,-9.5
TXFD10_N: IC33.AH32 J3.18 | length 0.7
  Top Layer w0.125: v1(71,-14) IC33.AH32@71.5,-13.5
TXFD10_P: IC33.AH33 J3.20 | length 0.7
  Top Layer w0.125: v1(71,-15) IC33.AH33@71.5,-14.5
TXFD11_N: IC33.AD27 J3.22 | length 0.7
  Top Layer w0.125: v1(75,-9) IC33.AD27@75.5,-8.5
TXFD11_P: IC33.AE27 J3.24 | length 0.7
  Top Layer w0.125: v1(74,-9) IC33.AE27@74.5,-8.5
TXFD12_N: IC33.AD26 J3.26 | length 0.7
  Top Layer w0.125: v1(75,-8) IC33.AD26@75.5,-7.5
TXFD12_P: IC33.AD25 J3.28 | length 0.7
  Top Layer w0.125: v1(75,-7) IC33.AD25@75.5,-6.5
USB_5VBUS: CON1.1 J2.9 R176.1
USB_DDM: CON1.2 J2.13 R171.2 R172.2
USB_DDP: CON1.3 J2.11 R173.2 R174.1
UTCA_CLK.UTCA_TONGUE2_CLK1_N: CN2.12 IC49.7
UTCA_CLK.UTCA_TONGUE2_CLK1_P: CN2.10 IC49.6
UTCA_CLK.UTCA_TONGUE2_CLK2_N: CN2.18 IC16.34
UTCA_CLK.UTCA_TONGUE2_CLK2_P: CN2.16 IC16.33
VREFDAC: C36.2 C37.1 IC5.2 IC8.2 IC28.1 R145.1
VREFQDRII: C396.1 C397.1 C418.2 C419.2 C420.2 C421.2 IC33.AD19 IC33.AJ22 IC33.AK24 IC33.AK29 IC33.E27 IC33.E28 IC33.J21 IC33.J22 IC42.H2 IC42.H10 IC43.H2 IC43.H10 IC45.6 | length 7.1
  Top Layer w0.32: v1(69,-11) IC33.AK29@69.5,-10.5 ; v1(69,-6) IC33.AK24@69.5,-5.5 ; v1(70,-4) IC33.AJ22@70.5,-3.5 ; v1(75,-1) IC33.AD19@75.5,-0.5 ; IC33.J22@90.5,-3.5 v1(91,-4) ; IC33.J21@90.5,-2.5 v1(91,-3) ; IC33.E28@94.5,-9.5 v1(95,-10) ; IC33.E27@94.5,-8.5 v1(95,-9) ; v1(119.25,-3.9) IC42.H10@119.75,-3.4 ; IC42.H2@127.75,-3.4 v1(128.25,-3.9)
"": 
pads on no net: CN1.4 CN1.5 CN1.7 CN1.8 CN2. CN3.0 CN4.2 CN4.3 CN4.3mate CN4.5 CN4.6 CN4.8 CN4.9 CN4.11 CN4.12 CN4.17 CN4.18 CN4.20 CN4.21 CN4.23 CN4.24 CN4.29 CN4.30 CN4.32 CN4.33 CN4.35 CN4.36 CN4.41 CN4.42 CN4.44 CN4.45 CN4.47 CN4.48 CN4.53 CN4.54 CN4.56 CN4.57 CN4.59 CN4.60 CN4.65 CN4.66 CN4.68 CN4.69 CN4.71 CN4.72 CN4.77 CN4.78 CN4.80 CN4.81 CN4.83 CN4.84 CN4.87 CN4.88 CN4.90 CN4.91 CN4.93 CN4.94 CN4.99 CN4.100 CN4.102 CN4.103 CN4.105 CN4.106 CN4.111 CN4.112 CN4.114 CN4.115 CN4.117 CN4.118 CN4.123 CN4.124 CN4.126 CN4.127 CN4.129 CN4.130 CN4.135 CN4.136 CN4.138 CN4.139 CN4.141 CN4.142 CN4.147 CN4.148 CN4.150 CN4.151 CN4.153 CN4.154 CN4.159 CN4.160 CN4.162 CN4.163 CN4.165 CN4.166 CN4.168 CN4.169 D10.1 IC1.A3 IC1.A5 IC1.A12 IC1.A13 IC1.A14 IC1.B11 IC1.B12 IC1.B13 IC1.B17 IC1.C10 IC1.C11 IC1.C12 IC1.C18 IC1.D3 IC1.D5 IC1.D7 IC1.D12 IC1.D14 IC1.D18 IC1.E6 IC1.E11 IC1.E15 IC1.E18 IC1.F1 IC1.F10 IC1.F11 IC1.F12 IC1.F14 IC1.F15 IC1.F16 IC1.F17 IC1.F18 IC1.G2 IC1.G3 IC1.G5 IC1.G6 IC1.G7 IC1.G9 IC1.G13 IC1.G14 IC1.G15 IC1.G16 IC1.G17 IC1.G18 IC1.H3 IC1.H4 IC1.H5 IC1.H13 IC1.K13 IC1.K17 IC1.L1 IC1.L3 IC1.L13 IC1.M1 IC1.M2 IC1.M3 IC1.M5 IC1.M6 IC1.M7 IC1.M14 IC1.M15 IC1.M16 IC1.N1 IC1.N2 IC1.N3 IC1.N4 IC1.N5 IC1.N6 IC1.P2 IC1.P4 IC1.P14 IC1.R2 IC1.R15 IC1.U13 IC6.4 IC7.5 IC9.1 IC12.8 IC12.11 IC13.8 IC13.23 IC13.24 IC13.28 IC13.29 IC13.31 IC13.32 IC14.2 IC14.3 IC14.8 IC14.23 IC14.24 IC14.28 IC14.29 IC14.31 IC14.32 IC15.1 IC15.4 IC15.6 IC16.2 IC16.15 IC16.18 IC16.19 IC16.20 IC16.47 IC16.48 IC17.5 IC20.5 IC22.1 IC24.6 IC24.7 IC24.8 IC24.9 IC24.12 IC24.13 IC24.14 IC24.15 IC27.1 IC27.2 IC27.3 IC27.4 IC27.5 IC27.6 IC27.10 IC27.11 IC27.14 IC27.15 IC27.20 IC27.21 IC27.22 IC27.23 IC27.24 IC27.25 IC27.26 IC27.27 IC27.28 IC27.33 IC27.34 IC27.35 IC27.38 IC27.39 IC27.40 IC27.45 IC27.46 IC27.47 IC27.48 IC28.3 IC29.E3 IC29.E7 IC29.H7 IC29.K2 IC29.K3 IC33.A30 IC33.A31 IC33.AA8 IC33.AA23 IC33.AB5 IC33.AB6 IC33.AB10 IC33.AB23 IC33.AC10 IC33.AC17 IC33.AD9 IC33.AD15 IC33.AD16 IC33.AD24 IC33.AE17 IC33.AE22 IC33.AE24 IC33.AE26 IC33.AF16 IC33.AF21 IC33.AF26 IC33.AG17 IC33.AG20 IC33.AG21 IC33.AG23 IC33.AG27 IC33.AG28 IC33.AH5 IC33.AH6 IC33.AH9 IC33.AH18 IC33.AH29 IC33.AH30 IC33.AJ9 IC33.AJ16 IC33.AJ21 IC33.AJ24 IC33.AJ26 IC33.AJ29 IC33.AJ30 IC33.AJ31 IC33.AJ32 IC33.AK17 IC33.AK34 IC33.AL21 IC33.AL34 IC33.AM16 IC33.AM21 IC33.AM22 IC33.AN22 IC33.AN23 IC33.AP15 IC33.AP22 IC33.B30 IC33.B31 IC33.C12 IC33.C13 IC33.C14 IC33.C30 IC33.C34 IC33.D12 IC33.D14 IC33.D19 IC33.D21 IC33.D30 IC33.D34 IC33.E12 IC33.E21 IC33.E31 IC33.F5 IC33.F6 IC33.F8 IC33.F31 IC33.F33 IC33.G8 IC33.G12 IC33.G33 IC33.H13 IC33.H22 IC33.H28 IC33.H29 IC33.J10 IC33.J11 IC33.J14 IC33.J24 IC33.K9 IC33.K11 IC33.K14 IC33.K26 IC33.K27 IC33.K31 IC33.L9 IC33.L10 IC33.L11 IC33.L13 IC33.L29 IC33.L30 IC33.M5 IC33.M6 IC33.M11 IC33.M12 IC33.M13 IC33.M26 IC33.M27 IC33.M33 IC33.N28 IC33.N29 IC33.N32 IC33.P31 IC33.P32 IC33.T5 IC33.T6 IC33.U28 IC33.U30 IC33.U31 IC33.U32 IC33.U33 IC33.V23 IC33.V27 IC33.V28 IC33.V29 IC33.V30 IC33.V32 IC33.V33 IC33.V34 IC33.W17 IC33.W18 IC33.W30 IC33.W34 IC33.Y31 IC33.Y32 IC36.B8 IC36.E8 IC36.F1 IC36.G2 IC36.H1 IC38.4 IC40.1 IC41.4 IC42.A2 IC42.A3 IC42.A10 IC42.F6 IC42.G6 IC42.H6 IC42.J6 IC42.K6 IC42.R1 IC42.R10 IC42.R11 IC43.A2 IC43.A3 IC43.A10 IC43.F6 IC43.G6 IC43.H6 IC43.J6 IC43.K6 IC43.R1 IC43.R10 IC43.R11 IC44.4 IC49.1 IC49.4 IC49.5 J1.109 J1.110 J2.5 J2.7 J2.109 J2.110 J3.37 J3.38 P5.12 P5.14 P6.17 P6.19 RP1.5 RP2.8 S1.3 S1.4 S2.3 S2.4 Tr1.4 Tr1.5 Tr1.12 Tr1.13 Tr2.2 Tr2.5 X3.2 X3.3 X4.2 X4.3

## Polygon pours and split planes (outlines as drawn)
no net on GND1 (split plane): 165.19,31.7 165.199,31.6 165.228,31.505 165.276,31.416 165.339,31.339 165.416,31.276 165.505,31.228 165.6,31.199 165.7,31.19 181.09,31.19 181.09,-37.34 13.461,-37.34 12.81,-36.689 12.81,-34.2 12.801,-34.1 12.772,-34.005 12.724,-33.916 12.661,-33.839 11.811,-32.989 11.734,-32.926 11.645,-32.878 11.55,-32.849 11.45,-32.84 0.011,-32.84 -0.64,-32.189 -0.64,32.089 0.011,32.74 11.85,32.74 11.95,32.749 12.045,32.778 12.134,32.826 12.211,32.889 13.111,33.789 13.174,33.866 13.222,33.955 13.251,34.05 13.26,34.15 13.26,36.939 13.761,37.44 165.19,37.44
no net on PWR1 (split plane): 165.19,31.7 165.199,31.6 165.228,31.505 165.276,31.416 165.339,31.339 165.416,31.276 165.505,31.228 165.6,31.199 165.7,31.19 181.09,31.19 181.09,-37.34 13.461,-37.34 12.81,-36.689 12.81,-34.2 12.801,-34.1 12.772,-34.005 12.724,-33.916 12.661,-33.839 11.811,-32.989 11.734,-32.926 11.645,-32.878 11.55,-32.849 11.45,-32.84 0.011,-32.84 -0.64,-32.189 -0.64,32.089 0.011,32.74 11.85,32.74 11.95,32.749 12.045,32.778 12.134,32.826 12.211,32.889 13.111,33.789 13.174,33.866 13.222,33.955 13.251,34.05 13.26,34.15 13.26,36.939 13.761,37.44 165.19,37.44
no net on GND2 (split plane): 165.19,31.7 165.199,31.6 165.228,31.505 165.276,31.416 165.339,31.339 165.416,31.276 165.505,31.228 165.6,31.199 165.7,31.19 181.09,31.19 181.09,-37.34 13.461,-37.34 12.81,-36.689 12.81,-34.2 12.801,-34.1 12.772,-34.005 12.724,-33.916 12.661,-33.839 11.811,-32.989 11.734,-32.926 11.645,-32.878 11.55,-32.849 11.45,-32.84 0.011,-32.84 -0.64,-32.189 -0.64,32.089 0.011,32.74 11.85,32.74 11.95,32.749 12.045,32.778 12.134,32.826 12.211,32.889 13.111,33.789 13.174,33.866 13.222,33.955 13.251,34.05 13.26,34.15 13.26,36.939 13.761,37.44 165.19,37.44
no net on PWR2 (split plane): 165.19,31.7 165.199,31.6 165.228,31.505 165.276,31.416 165.339,31.339 165.416,31.276 165.505,31.228 165.6,31.199 165.7,31.19 181.09,31.19 181.09,-37.34 13.461,-37.34 12.81,-36.689 12.81,-34.2 12.801,-34.1 12.772,-34.005 12.724,-33.916 12.661,-33.839 11.811,-32.989 11.734,-32.926 11.645,-32.878 11.55,-32.849 11.45,-32.84 0.011,-32.84 -0.64,-32.189 -0.64,32.089 0.011,32.74 11.85,32.74 11.95,32.749 12.045,32.778 12.134,32.826 12.211,32.889 13.111,33.789 13.174,33.866 13.222,33.955 13.251,34.05 13.26,34.15 13.26,36.939 13.761,37.44 165.19,37.44
no net on GND3 (split plane): 165.19,31.7 165.199,31.6 165.228,31.505 165.276,31.416 165.339,31.339 165.416,31.276 165.505,31.228 165.6,31.199 165.7,31.19 181.09,31.19 181.09,-37.34 13.461,-37.34 12.81,-36.689 12.81,-34.2 12.801,-34.1 12.772,-34.005 12.724,-33.916 12.661,-33.839 11.811,-32.989 11.734,-32.926 11.645,-32.878 11.55,-32.849 11.45,-32.84 0.011,-32.84 -0.64,-32.189 -0.64,32.089 0.011,32.74 11.85,32.74 11.95,32.749 12.045,32.778 12.134,32.826 12.211,32.889 13.111,33.789 13.174,33.866 13.222,33.955 13.251,34.05 13.26,34.15 13.26,36.939 13.761,37.44 165.19,37.44

## Keep-outs
Keep-Out Layer:
  rectangle: 13.45,35.06 165.15,36.75
  rectangle: 45.65,-36.78 165.15,-35.05

## Silkscreen, mask and mechanical layers (free items; w line width, h text height)
Mechanical 1:
  lines w0.01: 9.271,-32.5 12.45,-32.5 cw(c12.45,-33.5) 13.45,-33.5 13.45,-34.55 ccw(c13.95,-34.55) 13.95,-35.05 45.6,-35.05 ; 9.55,32.5 12.434,32.5 ; 12.4,32.5 ccw(c12.425,33.525) 13.45,33.5 13.45,36.25 cw(c13.95,36.25) 13.95,36.75 165.15,36.75 165.15,31.25 165.2,31.25 180.6,31.25 180.6,-29.3 167.95,-29.3 ; 45.6,-35.7 45.6,-36.25 ccw(c46.1,-36.25) 46.1,-36.75 158,-36.75 165.15,-36.75 165.15,-29.3 168.9,-29.3 ; 96.9,-63.95 ccw(c96.9,-63.625) 96.9,-63.3
Mechanical 15:
  circle w0.01: c6.75,31.5 r0.212
  circle w0.01: c6.75,-31.5 r0.206
  lines w0.01: 6.35,-31.5 7.2,-31.5 ; 6.35,31.5 7.2,31.5 ; 6.75,-31.9 6.75,-31.1 ; 6.75,31.1 6.75,31.9

## Text inside footprints (layer, text, board x,y; h text height)
CN1: Top Overlay "front" at 163.174,-24.077 h1.27 r90; Mechanical 1 "front panel" at 180.256,-20.458 h0.6 r90
DS1: Top Overlay "D" at 172.105,29.88 h1.52 r180
IC42: Mechanical 14 "A" at 131.05,-10.1 h0.6 r180; Mechanical 14 "B" at 131.05,-9.1 h0.6 r180; Mechanical 14 "C" at 131.05,-8.1 h0.6 r180; Mechanical 14 "D" at 131.05,-7.1 h0.6 r180; Mechanical 14 "E" at 131.05,-6.1 h0.6 r180; Mechanical 14 "F" at 131.05,-5.1 h0.6 r180; Mechanical 14 "G" at 131.05,-4.1 h0.6 r180; Mechanical 14 "H" at 131.05,-3.1 h0.6 r180; Mechanical 14 "J" at 131.05,-2.1 h0.6 r180; Mechanical 14 "K" at 131.05,-1.1 h0.6 r180; Mechanical 14 "L" at 131.05,-0.1 h0.6 r180; Mechanical 14 "M" at 131.05,0.9 h0.6 r180; Mechanical 14 "N" at 131.05,1.9 h0.6 r180; Mechanical 14 "P" at 131.05,2.9 h0.6 r180; Mechanical 14 "R" at 131.05,3.9 h0.6 r180; Mechanical 14 "1" at 128.425,-11.3 h0.6 r270; Mechanical 14 "6" at 123.475,-11.3 h0.6 r270; Mechanical 14 "7" at 122.475,-11.3 h0.6 r270; Mechanical 14 "8" at 121.5,-11.3 h0.6 r270; Mechanical 14 "9" at 120.425,-11.3 h0.6 r270; Mechanical 14 "10" at 119.625,-11.3 h0.6 r270; Mechanical 14 "11" at 118.575,-11.3 h0.6 r270; Mechanical 14 "5" at 124.475,-11.3 h0.6 r270; Mechanical 14 "4" at 125.475,-11.3 h0.6 r270; Mechanical 14 "3" at 126.475,-11.3 h0.6 r270; Mechanical 14 "2" at 127.475,-11.3 h0.6 r270
IC43: Mechanical 14 "A" at 46.7,-10.45 h0.6 r180; Mechanical 14 "B" at 46.7,-9.45 h0.6 r180; Mechanical 14 "C" at 46.7,-8.45 h0.6 r180; Mechanical 14 "D" at 46.7,-7.45 h0.6 r180; Mechanical 14 "E" at 46.7,-6.45 h0.6 r180; Mechanical 14 "F" at 46.7,-5.45 h0.6 r180; Mechanical 14 "G" at 46.7,-4.45 h0.6 r180; Mechanical 14 "H" at 46.7,-3.45 h0.6 r180; Mechanical 14 "J" at 46.7,-2.45 h0.6 r180; Mechanical 14 "K" at 46.7,-1.45 h0.6 r180; Mechanical 14 "L" at 46.7,-0.45 h0.6 r180; Mechanical 14 "M" at 46.7,0.55 h0.6 r180; Mechanical 14 "N" at 46.7,1.55 h0.6 r180; Mechanical 14 "P" at 46.7,2.55 h0.6 r180; Mechanical 14 "R" at 46.7,3.55 h0.6 r180; Mechanical 14 "1" at 44.075,-11.65 h0.6 r270; Mechanical 14 "6" at 39.125,-11.65 h0.6 r270; Mechanical 14 "7" at 38.125,-11.65 h0.6 r270; Mechanical 14 "8" at 37.15,-11.65 h0.6 r270; Mechanical 14 "9" at 36.075,-11.65 h0.6 r270; Mechanical 14 "10" at 35.275,-11.65 h0.6 r270; Mechanical 14 "11" at 34.225,-11.65 h0.6 r270; Mechanical 14 "5" at 40.125,-11.65 h0.6 r270; Mechanical 14 "4" at 41.125,-11.65 h0.6 r270; Mechanical 14 "3" at 42.125,-11.65 h0.6 r270; Mechanical 14 "2" at 43.125,-11.65 h0.6 r270
P2: Top Overlay "1" at 158.792,53.45 h1 r270; Top Overlay "5" at 158.792,48.05 h1 r270
P6: Top Overlay "20" at 103.716,-38.932 h1.27 r180; Top Overlay "19" at 103.716,-36.392 h1.27 r180; Top Overlay "1" at 130.64,-36.392 h1.27 r180; Top Overlay "2" at 130.64,-38.932 h1.27 r180